# Altium PCB UM_10.PcbDoc (part 3 of 3)
Units mil, origin at the board's own origin, x right, y up, seen from the top; angles counter-clockwise.
Board outline 3937.01 x 3937.01 mil, 4 copper layers (Top, GND_02, PWR_03, Bottom), stack 35.4 mil thick; 347 components, 178 nets, 1059 pads, 909 vias.
Unrouted connection lines stored in the file: 2.
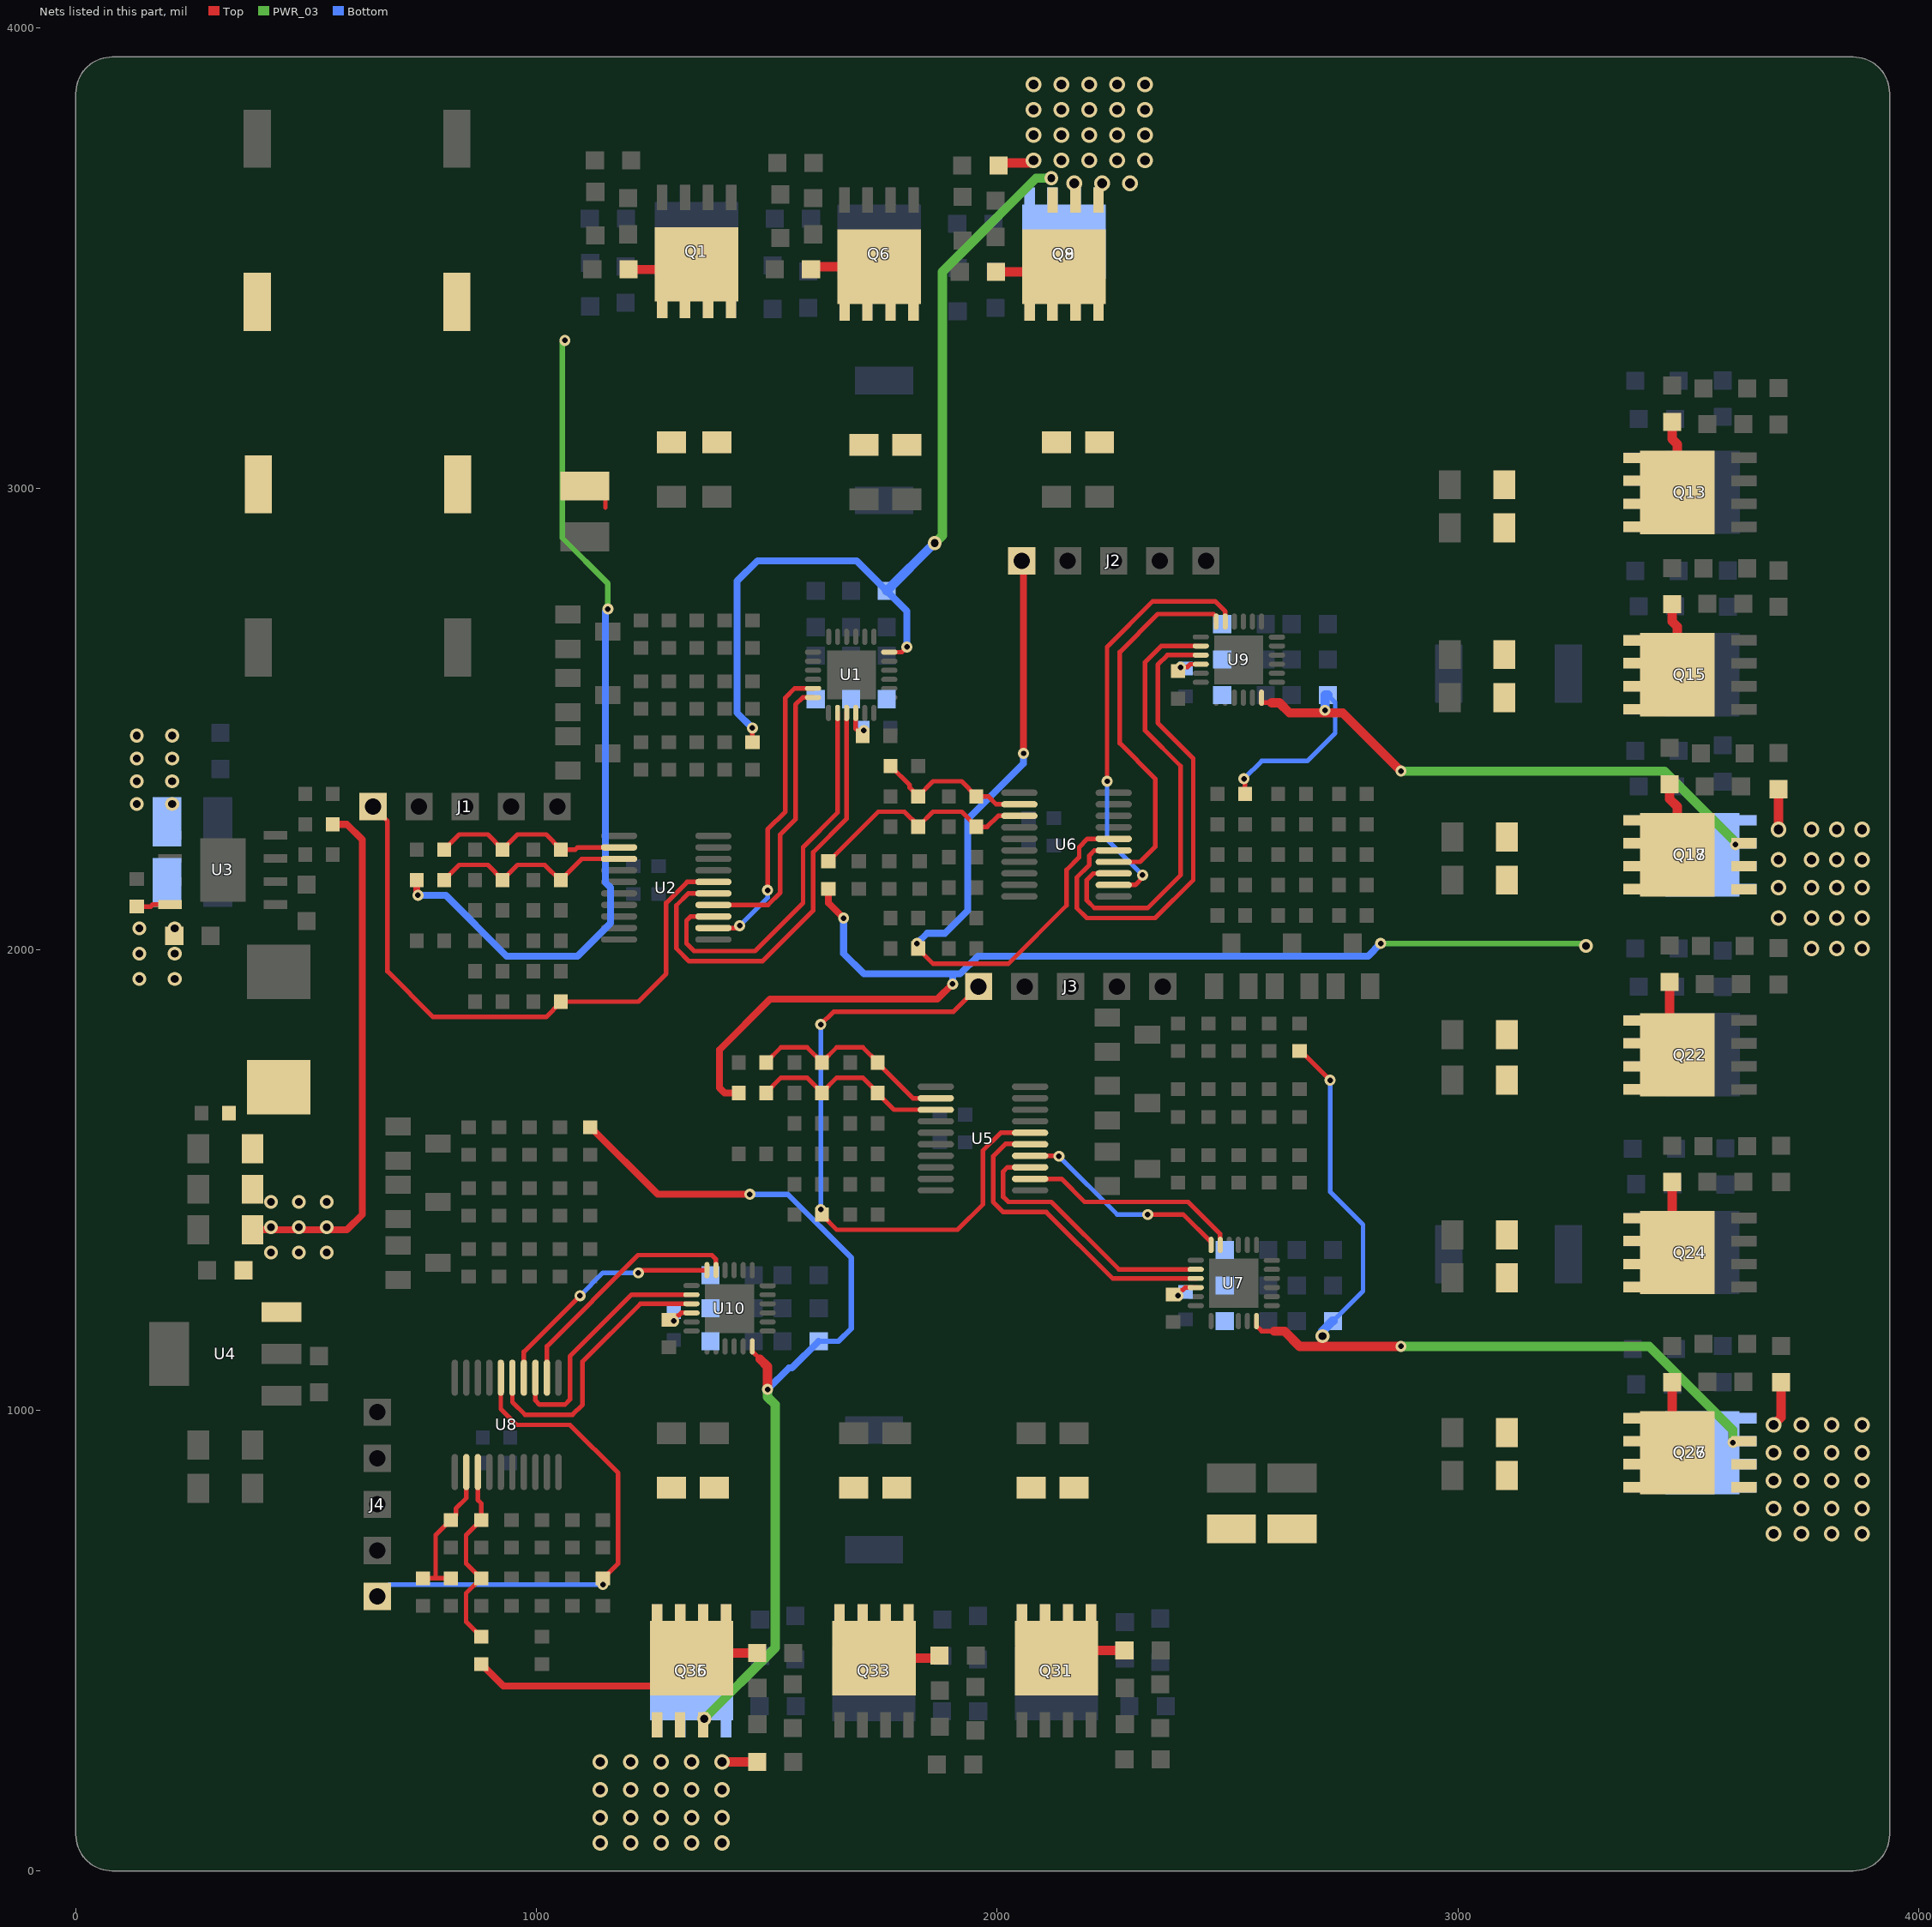
[diagram p5: the nets of this part, all layers, seen from the top]

## Via types
v1: diameter 34, hole 21, Top to Bottom, 505 vias
v2: diameter 24, hole 12, Top to Bottom, 272 vias
v3: diameter 30, hole 17, Top to Bottom, 132 vias

## Nets (pads, with @x,y where several pads share a name; then routed paths per layer and width w, separated by ;. In a path a pad name is that pad's centre, name@x,y a point inside that pad or via, vN(x,y) a via of type N, cw(c..) or ccw(c..) an arc to the next point about the centre after c; other vN are vias at no path point) (continued)
VCC_10V: C6.1 C20.1 C21.1 C22.1 C23.1 C24.1 C47.1 C48.1 C64.1 C65.1 C77.1 C90.1 C91.1 D1.2 D2.2 D3.2 D10.2 D11.2 D12.2 D19.2 D20.2 D21.2 D28.2 D29.2 D30.2 L1.2 R39.2 U1.4 U4.3 U7.4 U9.4 U10.4 | length 1381.9
  Top w10: C91.1@1287,1195.92 1287,1205.3 1308.64,1205.3 1314.5,1211.16 U10.4@1336.32,1211.16 ; U1.4@1692.84,2513.32 1692.84,2479.24 C6.1@1708.08,2464 ; C64.1@2381.5,1250.92 2381.5,1260.3 2402.25,1260.3 2408.11,1266.16 U7.4@2430.82,1266.16 ; C47.1@2392.5,2603.92 2392.5,2613.3 2413.25,2613.3 2419.11,2619.16 U9.4@2441.82,2619.16
  Top w15: C24.1@383.56,1391.5 588.5,1391.5 621.5,1424.5 621.5,2238.5 588.5,2271.5 R39.2@557.92,2271.5
  other v2: 1298,1193.5 2392.5,1248.5 1710.5,2475 2398,2612.5
  other v3: 423.5,1342 484,1342 544.5,1342 423.5,1397 484,1397 544.5,1397 423.5,1452 484,1452 544.5,1452
VCC_24V: C7.1 C10.1 C11.1 C12.1 C17.1 C18.1 C19.1 C30.1 C31.1 C32.1 C33.1 C34.1 C35.1 C36.1 C37.1 C38.1 C39.1 C40.1 C41.1 C52.1 C53.1 C54.1 C69.1 C70.1 C71.1 C78.1 C79.1 C80.1 C81.1 C82.1 C83.1 C84.1 C85.1 C95.1 C96.1 C97.1 C103.1 C104.1 C105.1 C106.1 C107.1 C108.1 C109.1 C110.1 C111.1 C112.1 Q1.5 Q1.6 Q1.7 Q1.8 Q1.9 Q6.5 Q6.6 Q6.7 Q6.8 Q6.9 Q8.5 Q8.6 Q8.7 Q8.8 Q8.9 Q13.5 Q13.6 Q13.7 Q13.8 Q13.9 Q15.5 Q15.6 Q15.7 Q15.8 Q15.9 Q17.5 Q17.6 Q17.7 Q17.8 Q17.9 Q22.5 Q22.6 Q22.7 Q22.8 Q22.9 Q24.5 Q24.6 Q24.7 Q24.8 Q24.9 Q26.5 Q26.6 Q26.7 Q26.8 Q26.9 Q31.5 Q31.6 Q31.7 Q31.8 Q31.9 Q33.5 Q33.6 Q33.7 Q33.8 Q33.9 Q35.5 Q35.6 Q35.7 Q35.8 Q35.9 R3.2 R34.2 R43.2 R79.2 R115.2 U3.8 | length 6956.4
  Top w10: R34.2@132,2093.08 162.58,2093.08 167,2097.5 U3.8@204.5,2097.5 ; C104.1@1104.66,3005.73 1149.5,3005.73 1149.5,2959
  Top w15: R3.2@740.08,2150.5 740.08,2119.92 v2(742.5,2117.5) ; R115.2@880,448.58 880.79,448.58 927.87,401.5 1303.5,401.5 1336.5,434.5 Q35.9@1336.5,461.86 ; R79.2@1438.58,1688.5 1408,1688.5 1397,1699.5 1397,1782 1507,1892 1870,1892 v2(1903,1925) ; R43.2@1633.5,2131.58 1633.5,2101 v2(1666.5,2068)
  Top w20: C10.1@1199.87,3476 1347.5,3476 Q1.9@1347.5,3487.14 ; Q35.9@1336.5,461.86 1336.5,473 C97.1@1478.63,473 ; C11.1@1595.87,3476 1595.87,3481.64 Q6.9@1743.5,3481.64 ; Q33.9@1732.5,461.86 1874.63,461.86 C96.1@1874.63,467.5 ; C12.1@1997.37,3470.5 2145,3470.5 Q8.9@2145,3481.64 ; Q31.9@2128.5,461.86 2128.5,478.5 C95.1@2276.13,478.5 ; C70.1@3459.5,1929.63 3459.5,1787.64 Q22.9@3476.14,1771 ; C54.1@3459.5,2358.63 3459.5,2326.5 3476.14,2309.86 Q17.9@3476.14,2205.5 ; C71.1@3465,1060.63 3465,918.64 Q26.9@3476.14,907.5 ; C69.1@3465,1495.13 3465,1353.14 Q24.9@3476.14,1342 ; C52.1@3465,2749.13 3465,2711.5 3476.14,2700.36 Q15.9@3476.14,2596 ; C53.1@3465,3145.13 3465,3107.5 3476.14,3096.36 Q13.9@3476.14,2992
  PWR_03 w12: v2(1061.5,3322) 1056,3316.5 1056,3311 1056,2893 1155,2794 v2(1155,2739) ; v2(2832.5,2013) 3272.5,2013 v3(3278,2007.5)
  Bottom w15: v2(742.5,2117.5) 803,2117.5 935,1985.5 1089,1985.5 1160.5,2057 1160.5,2134 1149.5,2145 1149.5,2733.5 v2(1155,2739) ; v2(1666.5,2068) 1666.5,1991 1710.5,1947 1903,1947 ; v2(1903,1925) 1903,1947 ; v2(2832.5,2013) 2805,1985.5 1958,1985.5 1919.5,1947 1903,1947
  other v3: 137.5,1936 214.5,1936 137.5,1991 214.5,1991 137.5,2046 214.5,2046 132,2315.5 209,2315.5 132,2365 209,2365 132,2414.5 209,2414.5 132,2464 209,2464
VH_1: U1.23 U2.12 | length 663.8
  Top w10: U2.12@1383.86,2046.5 1436,2046.5 v2(1441,2051.5) ; v2(1501.5,2128.5) 1501.5,2260.5 1540,2299 1540,2546.5 1559.97,2566.47 U1.23@1600.32,2566.47
  Bottom w10: v2(1441,2051.5) 1501.5,2112 v2(1501.5,2128.5)
VH_2: U6.12 U9.23 | length 930.1
  Top w10: v2(2238.5,2365) 2238.5,2656.5 2337.5,2755.5 2472.97,2755.5 2494.97,2733.5 U9.23@2494.97,2711.68 ; U6.12@2252.86,2140 2299.5,2140 2315.5,2156 v2(2315.5,2161.5)
  Bottom w10: v2(2238.5,2365) 2238.5,2238.5 v2(2315.5,2161.5)
VH_3: U5.12 U7.23 | length 485.9
  Top w10: U5.12@2071.36,1502 2139.5,1502 2189.5,1452 2414.5,1452 2483.97,1382.53 U7.23@2483.97,1358.68
VH_4: U8.12 U10.23 | length 544.7
  Top w10: U8.12@1022.5,1070.36 1022.5,1138.5 1220.5,1336.5 1380.5,1336.5 1389.47,1327.53 U10.23@1389.47,1303.68
VL_1: U1.2 U2.13 | length 858.1
  Top w10: U2.13@1383.86,2071.5 1334.5,2071.5 1325.5,2062.5 1325.5,2013 1342,1996.5 1474,1996.5 1578.5,2101 1578.5,2222 1653.47,2296.97 U1.2@1653.47,2513.32
VL_2: U6.13 U9.2 | length 977.8
  Top w10: U6.13@2252.86,2165 2208.49,2165 2194.5,2151.01 2194.5,2106.5 2211,2090 2326.5,2090 2398,2161.5 2398,2398 2321,2475 2321,2623.5 2356.03,2658.53 U9.2@2441.82,2658.53
VL_3: U5.13 U7.2 | length 600.1
  Top w10: U5.13@2071.36,1527 2022,1527 2013,1518 2013,1463 2024,1452 2117.5,1452 2263.97,1305.53 U7.2@2430.82,1305.53
VL_4: U8.13 U10.2 | length 545.5
  Top w10: U8.13@997.5,1070.36 997.5,1021 1006.5,1012 1061.5,1012 1072.5,1023 1072.5,1116.5 1206.53,1250.53 U10.2@1336.32,1250.53
VOD_1: C3.1 R3.1 R4.2 U2.3 | length 455.2
  Top w10: R3.1@799.92,2150.5 799.92,2151.29 832.13,2183.5 894.21,2183.5 R4.2@926.42,2151.29 ; R4.2@926.42,2150.5 R4.2@926.42,2151.29 ; U2.3@1179.14,2196.5 1098.13,2196.5 1052.92,2151.29 C3.1@1052.92,2150.5 1051.32,2150.5 1051.32,2149.68 1017.5,2183.5 958.63,2183.5 R4.2@926.42,2151.29
VOD_2: C25.1 R43.1 R44.2 U6.3 | length 514.5
  Top w10: R43.1@1633.5,2191.42 1634.29,2191.42 1741.87,2299 1798.5,2299 1829.57,2267.93 1829.57,2266 R44.2@1828.42,2266 1828.42,2266.79 1860.63,2299 1922.71,2299 1954.92,2266.79 C25.1@1954.92,2266 1978,2266 2002,2290 U6.3@2048.14,2290
VOD_3: C60.1 R79.1 R80.2 U5.3 | length 439.5
  Top w10: R79.1@1498.42,1688.5 1498.42,1689.29 1530.63,1721.5 1587.21,1721.5 R80.2@1619.42,1689.29 ; R80.2@1619.42,1688.5 R80.2@1619.42,1689.29 ; U5.3@1866.64,1652 1776.13,1652 1740.42,1687.71 C60.1@1740.42,1688.5 1740.42,1689.29 1708.21,1721.5 1651.63,1721.5 R80.2@1619.42,1689.29
VOD_4: C86.1 R115.1 R116.2 U8.3 | length 416.1
  Top w10: U8.3@872.5,865.64 872.5,805 880,797.5 C86.1@880,761.42 879.21,761.42 847,729.21 847,667.13 R116.2@879.21,634.92 ; R115.1@880,508.42 879.21,508.42 847,540.63 847,602.71 R116.2@879.21,634.92 ; R116.2@880,634.92 R116.2@879.21,634.92
VR_1: C1.1 R1.2 R2.2 U2.2 | length 437
  Top w10: R1.2@799.92,2216.5 799.92,2217.29 832.13,2249.5 894.21,2249.5 R2.2@926.42,2217.29 ; R2.2@926.42,2216.5 R2.2@926.42,2217.29 ; U2.2@1179.14,2221.5 1089,2221.5 1084,2216.5 C1.1@1052.92,2216.5 1052.92,2217.29 1020.71,2249.5 958.63,2249.5 R2.2@926.42,2217.29
VR_2: C26.1 R41.2 R42.2 U6.2 | length 345
  Top w10: R41.2@1768.58,2398 1809.92,2356.66 1809.92,2351.29 R42.2@1828.42,2332.79 ; R42.2@1828.42,2332 R42.2@1828.42,2332.79 ; U6.2@2048.14,2315 1997.82,2315 1980.82,2332 C26.1@1954.92,2332 1954.92,2332.79 1922.71,2365 1860.63,2365 R42.2@1828.42,2332.79
VR_3: C61.1 R77.2 R78.2 U5.2 | length 456.5
  Top w10: R77.2@1498.42,1754.5 1498.42,1755.29 1530.63,1787.5 1587.21,1787.5 R78.2@1619.42,1755.29 ; R78.2@1619.42,1754.5 R78.2@1619.42,1755.29 ; U5.2@1866.64,1677 1817.13,1677 1740.42,1753.71 C61.1@1740.42,1754.5 1740.42,1755.29 1708.21,1787.5 1651.63,1787.5 R78.2@1619.42,1755.29
VR_4: C87.1 R113.2 R114.2 U8.2 | length 319.7
  Top w10: R113.2@753.5,634.92 781,634.92 ; R114.2@814,634.92 781,634.92 ; U8.2@847.5,865.64 847.5,809 825,786.5 825,771.63 814.79,761.42 C87.1@814,761.42 813.21,761.42 781,729.21 781,634.92
W_1: C9.2 Q8.1 Q8.2 Q8.3 Q9.5 Q9.6 Q9.7 Q9.8 Q9.9 R16.1 R31.1 U1.12 | length 2066.9
  Top w10: R31.1@1468.5,2449.92 v2(1468.5,2480.5) ; U1.12@1765.68,2645.21 1793,2645.21 1793,2645.5 v2(1804,2656.5)
  Top w20: R16.1@2002.87,3701.5 2002.87,3706.91 2079,3706.91 v1(2079,3712.5)
  PWR_03 w20: v3(1864.5,2882) 1881,2898.5 1881,3470.5 2084.5,3674 v3(2117.5,3674)
  Bottom w15: v2(1468.5,2480.5) 1435.5,2513.5 1435.5,2799.5 1479.5,2843.5 1694.87,2843.5 C9.2@1760,2778.37 1804,2734.37 v2(1804,2656.5)
  Bottom w20: C9.2@1760,2778.37 1863.63,2882 v3(1864.5,2882)
  other v1: 2167,3663 2227.5,3663 2288,3663 2139.5,3712.5 2200,3712.5 2260.5,3712.5 2321,3712.5 2079,3767.5 2139.5,3767.5 2200,3767.5 2260.5,3767.5 2321,3767.5 2079,3822.5 2139.5,3822.5 2200,3822.5 2260.5,3822.5 2321,3822.5 2079,3877.5 2139.5,3877.5 2200,3877.5 2260.5,3877.5 2321,3877.5
W_2: C51.2 Q17.1 Q17.2 Q17.3 Q18.5 Q18.6 Q18.7 Q18.8 Q18.9 R56.1 R71.1 U9.12 | length 1701.8
  Top w4: v2(3602.5,2227.5) 3605.5,2230.5 Q17.3@3621.01,2230.5
  Top w10: v2(2535.5,2370.5) 2537.92,2368.08 R71.1@2537.92,2337.5 ; U9.12@2573.71,2534.12 U9.12@2573.71,2546.32 ; U9.12@2574,2535.5 2574,2546.04 U9.12@2573.71,2546.32 ; 2596,2535.5 2573.71,2535.5 U9.12@2573.71,2546.32
  Top w20: 2596,2535.5 2612.5,2535.5 2634.5,2513.5 2750,2513.5 v2(2876.5,2387) ; v1(3696,2260.5) R56.1@3696,2347.63
  PWR_03 w20: v2(2876.5,2387) 3448.5,2387 3602.5,2233 v2(3602.5,2227.5)
  Bottom w10: v2(2535.5,2370.5) 2574,2409 2673,2409 2733.5,2469.5 2733.5,2536.37 C51.2@2717.87,2552
  Bottom w20: v2(2711.5,2519) 2711.5,2552 C51.2@2717.87,2552
  other v1: 3767.5,2002 3822.5,2002 3877.5,2002 3696,2068 3767.5,2068 3822.5,2068 3877.5,2068 3696,2134 3767.5,2134 3822.5,2134 3877.5,2134 3696,2194.5 3767.5,2194.5 3822.5,2194.5 3877.5,2194.5 3767.5,2260.5 3822.5,2260.5 3877.5,2260.5
W_3: C68.2 Q26.1 Q26.2 Q26.3 Q27.5 Q27.6 Q27.7 Q27.8 Q27.9 R92.1 R107.1 U7.12 | length 2027
  Top w4: v2(3597,929.5) 3600,932.5 Q26.3@3621.01,932.5
  Top w10: U7.12@2562.71,1193.32 2563,1193.04 2563,1182.5 2574,1171.5 2601.5,1171.5 ; R107.1@2656.5,1779.58 2658.92,1779.58 v2(2722.5,1716)
  Top w20: 2601.5,1171.5 2623.5,1171.5 2656.5,1138.5 2706,1138.5 ; v3(2706,1160.5) 2706,1138.5 ; v2(2876.5,1138.5) 2706,1138.5 ; v1(3685,968) 3701.5,984.5 R92.1@3701.5,1060.63
  PWR_03 w20: v2(2876.5,1138.5) 3415.5,1138.5 3597,957 v2(3597,929.5)
  Bottom w10: v3(2706,1160.5) v3@2706,1171.5 ; v2(2722.5,1716) 2722.5,1474 2794,1402.5 2794,1258.63 C68.2@2728.87,1193.5
  Bottom w20: v3@2706,1171.5 2728,1193.5 C68.2@2728.87,1193.5
  other v1: 3685,731.5 3745.5,731.5 3811.5,731.5 3877.5,731.5 3685,786.5 3745.5,786.5 3811.5,786.5 3877.5,786.5 3685,847 3745.5,847 3811.5,847 3877.5,847 3685,907.5 3745.5,907.5 3811.5,907.5 3877.5,907.5 3745.5,968 3811.5,968 3877.5,968
W_4: C94.2 Q35.1 Q35.2 Q35.3 Q36.5 Q36.6 Q36.7 Q36.8 Q36.9 R128.1 R143.1 U10.12 | length 2045.1
  Top w10: R143.1@1116.5,1611.5 R143.1@1116.5,1613.92 ; U10.12@1468.21,1138.32 1468.5,1138.04 1468.5,1127.5 1485,1111
  Top w15: R143.1@1116.5,1613.92 1117.29,1613.92 1262.71,1468.5 v2(1463,1468.5)
  Top w20: v1(1402.5,236.5) R128.1@1478.63,236.5 ; 1485,1111 1501.5,1094.5 v2(1501.5,1045)
  PWR_03 w20: v3(1364,330) 1518,484 1518,1012 1501.5,1028.5 v2(1501.5,1045)
  Bottom w12: v2(1463,1468.5) 1545.5,1468.5 1683,1331 1683,1177 1655.5,1149.5 C94.2@1612.37,1149.5
  Bottom w15: v2(1501.5,1045) 1548.15,1091.65 1554.52,1091.65 C94.2@1612.37,1149.5
  other v1: 1138.5,60.5 1204.5,60.5 1270.5,60.5 1336.5,60.5 1402.5,60.5 1138.5,115.5 1204.5,115.5 1270.5,115.5 1336.5,115.5 1402.5,115.5 1138.5,176 1204.5,176 1270.5,176 1336.5,176 1402.5,176 1138.5,236.5 1204.5,236.5 1270.5,236.5 1336.5,236.5
WH_1: U1.24 U2.14 | length 622.7
  Top w10: U2.14@1383.86,2096.5 1502.5,2096.5 1529,2123 1529,2249.5 1562,2282.5 1562,2531.18 1577.61,2546.79 U1.24@1600.32,2546.79
WH_2: U6.14 U9.24 | length 814.6
  Top w10: U6.14@2252.86,2190 2310,2190 2343,2223 2343,2370.5 2266,2447.5 2266,2645.5 2348.5,2728 2469.5,2728 2475.29,2722.21 U9.24@2475.29,2711.68
WH_3: U5.14 U7.24 | length 476.9
  Top w10: U5.14@2071.36,1552 2071.36,1551.73 2134,1551.73 v2(2134,1551) ; v2(2326.5,1424.5) 2404.07,1424.5 2464.29,1364.29 U7.24@2464.29,1358.68
  Bottom w10: v2(2134,1551) 2260.5,1424.5 v2(2326.5,1424.5)
WH_4: U8.14 U10.24 | length 526.8
  Top w10: U8.14@972.5,1070.36 972.5,1126.5 v2(1094.5,1248.5) ; v2(1221,1298) 1226.67,1303.67 U10.24@1369.79,1303.68
  Bottom w10: v2(1094.5,1248.5) 1144,1298 v2(1221,1298)
WL_1: U1.3 U2.15 | length 999
  Top w10: U2.15@1383.86,2123 U2.15@1383.86,2121.5 1329.5,2121.5 1303.5,2095.5 1303.5,2002 1331,1974.5 1490.5,1974.5 1600.5,2084.5 1600.5,2211 1673.16,2283.66 U1.3@1673.16,2513.32
WL_2: U6.15 U9.3 | length 1080.4
  Top w10: U6.15@2252.86,2215 2211,2215 2200,2204 2200,2183.5 2172.5,2156 2172.5,2090 2194.5,2068 2343,2068 2425.5,2150.5 2425.5,2414.5 2348.5,2491.5 2348.5,2618 2369.34,2638.84 U9.3@2441.82,2638.84
WL_3: U5.15 U7.3 | length 700.2
  Top w10: U5.15@2071.36,1577 2071.36,1577.97 2017.97,1577.97 1991,1551 1991,1452 2013,1430 2106.5,1430 2250.66,1285.84 U7.3@2430.82,1285.84
WL_4: U8.15 U10.3 | length 607.6
  Top w10: U8.15@947.5,1070.36 947.5,1017.5 975,990 1078,990 1100,1012 1100,1105.5 1225.34,1230.84 U10.3@1336.32,1230.84
ZF_1: J1.5 R24.1 U2.16 | length 1331
  Top w10: J1.5@645,2310 676.5,2278.5 676.5,1952.5 775.5,1853.5 1020.71,1853.5 1052.92,1885.71 R24.1@1052.92,1886.5 1221,1886.5 1281.5,1947 1281.5,2101 1327,2146.5 U2.16@1383.86,2146.5
ZF_2: J2.5 R64.1 U6.16 | length 1571.2
  Top w10: v2(1826,2013) 1828.42,2010.58 R64.1@1828.42,2002 1828.42,2001.21 1860.63,1969 2024,1969 2150.5,2095.5 2150.5,2172.5 2178,2200 2178,2222 2196,2240 U6.16@2252.86,2240
  Top w15: J2.5@2053,2843.5 2057,2839.5 v2(2057,2425.5)
  Bottom w15: v2(1826,2013) 1848,2035 1886.5,2035 1936,2084.5 1936,2282.5 2057,2403.5 v2(2057,2425.5)
ZF_3: J3.5 R100.1 U5.16 | length 1435
  Top w4: v2(1617,1435.5) 1619.42,1433.08 R100.1@1619.42,1424.5
  Top w10: v2(1617,1435.5) 1617,1441 1619.42,1438.58 R100.1@1619.42,1424.5 1619.42,1423.71 1651.63,1391.5 1914,1391.5 1969,1446.5 1969,1563.5 2007.5,1602 U5.16@2071.36,1602 ; v2(1617,1837) 1644.5,1864.5 1904.5,1864.5 J3.5@1959.5,1919.5
  Bottom w10: v2(1617,1435.5) v2(1617,1837)
ZF_4: J4.5 R136.1 U8.16 | length 1136.3
  Top w10: U8.16@922.5,1070.36 922.5,1002.5 957,968 1072.5,968 1177,863.5 1177,667.13 1144.79,634.92 R136.1@1144,634.92 v2(1144,621.5)
  Bottom w10: J4.5@654.5,595.5 680.5,621.5 v2(1144,621.5)
pads on no net: Q2.1 Q2.2 Q2.3 Q3.1 Q3.2 Q3.3 Q4.1 Q4.2 Q4.3 Q10.1 Q10.2 Q10.3 Q11.1 Q11.2 Q11.3 Q12.1 Q12.2 Q12.3 Q19.1 Q19.2 Q19.3 Q20.1 Q20.2 Q20.3 Q21.1 Q21.2 Q21.3 Q28.1 Q28.2 Q28.3 Q29.1 Q29.2 Q29.3 Q30.1 Q30.2 Q30.3 U1.5 U1.7 U1.8 U1.21 U3.5 U3.6 U7.5 U7.7 U7.8 U7.21 U9.5 U9.7 U9.8 U9.21 U10.5 U10.7 U10.8 U10.21

## Polygon pours and split planes (outlines as drawn)
VCC_24V on Top "Top-VCC_24V" (solid, remove dead copper, pour order 154): 3322,3107.5 3322,2865.5 3580.5,2865.5 3580.5,3107.5
GND on Top "Top-GND" (solid, remove dead copper, pour order 152): -5.5,3520 1094.5,3520 1094.5,3943.5 -5.5,3943.5
V_4 on Top "Top-V_4" (solid, remove dead copper, pour order 148): 1782,341 1595,341 1595,198 1523.5,198 1523.5,-5.5 1826,-5.5 1826,275 1782,275
VCC_24V on Top "Top-VCC_24V 1" (solid, remove dead copper, pour order 142): 3346.46,590.55 3346.46,787.4 2322.83,787.4 2322.83,866.14 1221,866.14 1221,590.55
U_1 on Top "Top-U_1" (solid, remove dead copper, pour order 140): 1303.5,3602.5 1479.5,3602.5 1479.5,3745.5 1556.5,3745.5 1556.5,3938 1254,3938 1254,3674 1303.5,3674
W_3 on Top "Top-W_3" (solid, remove dead copper, pour order 136): 3597,709.5 3938,709.5 3938,995.5 3663,995.5 3663,957 3597,957
W_1 on Top "Top-W_1" (solid, remove dead copper, pour order 134): 2095.5,3597 2359.5,3597 2359.5,3940.75 2059.75,3940.75 2051.5,3932.5 2051.5,3663 2095.5,3663
VCC_5.0V on Top "Top-VCC_5.0V" (solid, remove dead copper, pour order 124): 324.5,869 110,869 110,561 324.5,561
W_2 on Top "Top-W_2" (solid, remove dead copper, pour order 120): 3597,2255 3597,2040.5 3729,2040.5 3729,1958 3938,1958 3938,2293.5 3663,2293.5 3663,2255
AGND on Top "Top-AGND" (solid, remove dead copper, pour order 114): 297,1677.5 0,1677.5 0,1270.5 324.5,1270.5 324.5,1595 297,1595
VCC_24V on Top "Top-VCC_24V 2" (solid, remove dead copper, pour order 112): 3426.5,2068 3322,2068 3322,1639 3580.5,1639 3580.5,1886.5 3426.5,1886.5
W_4 on Top "Top-W_4" (solid, remove dead copper, pour order 110): 1386,346.5 1111,346.5 1111,0 1430,0 1430,275 1386,275
GND on Top "Top-GND 1" (solid, remove dead copper, pour order 108): 1221,885.5 2337.5,885.5 2337.5,803 2964.5,803 2970,808.5 2970,1023 1221,1023
VCC_24V on Top "Top-VCC_24V 3" (solid, remove dead copper, pour order 104): 1430,3437.5 1430,3316.5 1853.5,3316.5 1853.5,3586 1633.5,3586 1633.5,3437.5
VCC_10V on Top "Top-VCC_10V" (solid, remove dead copper, pour order 100): 401.5,1320 561,1320 561,1474 401.5,1474
GND on Top "Top-GND 2" (solid, remove dead copper, pour order 98): 1193.5,2920.5 2915,2920.5 2915,803 3052.5,803 3052.5,3047 1193.5,3047
U_4 on Top "Top-U_4" (solid, remove dead copper, pour order 94): 1985.5,346.5 1985.5,192.5 1919.5,192.5 1919.5,5.5 2222,5.5 2222,275 2178,275 2178,346.5
VCC_24V on Top "Top-VCC_24V 4" (solid, remove dead copper, pour order 90): 3410,2904 3344,2904 3344,2695 3410,2695
VCC_24V on Top "Top-VCC_24V 5" (solid, remove dead copper, pour order 88): 2018.5,610.5 2018.5,357.5 2244,357.5 2244,610.5
VCC_24V on Top "Top-VCC_24V 6" (solid, remove dead copper, pour order 86): 3333,2706 3333,2486 3580.5,2486 3580.5,2706
VCC_24V on Top "Top-VCC_24V 7" (solid, remove dead copper, pour order 82): 1837,3437.5 1837,3316.5 2244,3316.5 2244,3586 2029.5,3586 2029.5,3437.5
VCC_24V on Top "Top-VCC_24V 8" (solid, remove dead copper, pour order 80): 2795.28,3346.46 2795.28,3063.5 3070.87,3063.5 3070.87,708.66 3346.46,708.66 3346.46,3346.46
U_2 on Top "Top-U_2" (solid, remove dead copper, pour order 74): 3597,3041.5 3597,2865.5 3729,2865.5 3729,2783 3938,2783 3938,3085.5 3663,3085.5 3663,3041.5
VCC_24V on Top "Top-VCC_24V 9" (solid, remove dead copper, pour order 72): 27.5,2959 27.5,2282.5 236.5,2282.5 236.5,2959
VCC_24V on Top "Top-VCC_24V 10" (solid, remove dead copper, pour order 64): 2035,561 2035,616 1600.5,616 1600.5,357.5 1842.5,357.5 1842.5,503.25 1944.25,503.25 2002,561
VCC_10V on Top "Top-VCC_10V 1" (solid, remove dead copper, pour order 60): 506,1754.5 374,1754.5 374,1677.5 313.5,1677.5 313.5,1611.5 341,1611.5 341,1276 451,1276 451,1611.5 506,1611.5
V_1 on Top "Top-V_1" (solid, remove dead copper, pour order 58): 1892,3597 1892,3734.5 1958,3734.5 1958,3938 1650,3938 1650,3663 1688.5,3663 1688.5,3597
$$$11219 on Top "Top-$$$11219" (solid, remove dead copper, pour order 56): 407,2123 533.5,2123 533.5,2167 407,2167
VCC_24V on Top "Top-VCC_24V 11" (solid, remove dead copper, pour order 54): 1501.5,555.5 1501.5,500.5 1628,500.5 1628,555.5
VCC_24V on Top "Top-VCC_24V 12" (solid, remove dead copper, pour order 52): 1221,616 1221,363 1452,363 1452,445.5 1523.5,445.5 1523.5,506 1562,506 1611.5,555.5 1611.5,616
VCC_24V on Top "Top-VCC_24V 13" (solid, remove dead copper, pour order 48): 0,3503.94 0,2948 1181.1,2948 1181.1,3063.5 2874.02,3063.5 2874.02,3346.46 1220.47,3346.46 1220.47,3426.5 1039.5,3426.5 1039.5,3503.94
GND on Top "Top-GND 3" (solid, remove dead copper, pour order 42): 1606,2931.5 253,2931.5 253,2370.5 1028.5,2370.5 1028.5,2761 1496,2761 1496,2799.5 1606,2799.5
V_2 on Top "Top-V_2" (solid, remove dead copper, pour order 40): 3591.5,2651 3591.5,2458.5 3729,2458.5 3729,2403.5 3932.5,2403.5 3932.5,2689.5 3657.5,2689.5 3657.5,2651
AGND on Top "Top-AGND 1" (solid, remove dead copper, pour order 36): 341,781 555.5,781 555.5,1078 341,1078
$$$11220 on Top "Top-$$$11220" (solid, remove dead copper, pour order 34): 407,2106.5 407,2073.5 368.5,2073.5 368.5,1897.5 533.5,1897.5 533.5,2106.5
VCC_5.0V on Top "Top-VCC_5.0V 1" (solid, remove dead copper, pour order 28): 363,1155 324.5,1155 324.5,1193.5 154,1193.5 154,1050.5 231,1050.5 231,781 324.5,781 324.5,1094.5 363,1094.5
VCC_24V on Top "Top-VCC_24V 14" (solid, remove dead copper, pour order 26): 99,2106.5 99,1908.5 236.5,1908.5 236.5,2106.5
AGND on Top "Top-AGND 2" (solid, remove dead copper, pour order 22): 253,2007.5 352,2007.5 352,2090 390.5,2090 390.5,2244 253,2244
VCC_5.0V on Top "Top-VCC_5.0V 2" (solid, remove dead copper, pour order 20): 341,1155 341,1094.5 555.5,1094.5 555.5,1155
VCC_24V on Top "Top-VCC_24V 15" (solid, remove dead copper, pour order 18): 3377,1650 3300,1650 3300,1221 3580.5,1221 3580.5,1463 3429.25,1463 3429.25,1564.75 3377,1617
VCC_24V on Top "Top-VCC_24V 16" (solid, remove dead copper, pour order 16): 1210,3426.5 1210,3327.5 1452,3327.5 1452,3591.5 1237.5,3591.5 1237.5,3426.5
VCC_24V on Top "Top-VCC_24V 17" (solid, remove dead copper, pour order 14): 3388,1243 3311,1243 3311,803 3580.5,803 3580.5,1034 3434.75,1034 3434.75,1135.75 3388,1182.5
U_3 on Top "Top-U_3" (solid, remove dead copper, pour order 12): 3597,1820.5 3597,1606 3740,1606 3740,1529 3938,1529 3938,1864.5 3657.5,1864.5 3657.5,1820.5
V_3 on Top "Top-V_3" (solid, remove dead copper, pour order 10): 3597,1391.5 3597,1177 3740,1177 3740,1100 3938,1100 3938,1435.5 3663,1435.5 3663,1391.5
VCC_24V on Top "Top-VCC_24V 18" (solid, remove dead copper, pour order 4): 3421,2502.5 3316.5,2502.5 3316.5,2057 3580.5,2057 3580.5,2326.5 3421,2326.5
VCC_10V on Top "Top-VCC_10V 2" (solid, remove dead copper, pour order 0): 341,1309 341,1188 489.5,1188 489.5,1309
W_3 on Bottom "Bottom-W_3" (solid, remove dead copper, pour order 146): 3448.5,995.5 3448.5,709.5 3927,709.5 3927,995.5
GND on Bottom "Bottom-GND" (solid, remove dead copper, pour order 144): 2898.5,979 3184.5,979 3184.5,3179 2898.5,3179
U_3 on Bottom "Bottom-U_3" (solid, remove dead copper, pour order 138): 3454,1864.5 3454,1650 3619,1650 3619,1529 3938,1529 3938,1864.5
VCC_10V on Bottom "Bottom-VCC_10V" (solid, remove dead copper, pour order 132): 1782,2568.5 1518,2568.5 1518,2095.5 1644.5,2095.5 1644.5,2348.5 1738,2348.5 1738,2508 1782,2508
W_2 on Bottom "Bottom-W_2" (solid, remove dead copper, pour order 130): 3454,2293.5 3454,2040.5 3608,2040.5 3608,1958 3927,1958 3927,2293.5
IOUT_4 on Bottom "Bottom-IOUT_4" (solid, remove dead copper, pour order 128): 1248.5,522.5 1386,522.5 1386,588.5 1595,588.5 1595,522.5 1782,522.5 1782,588.5 1991,588.5 1991,522.5 2167,522.5 2167,726 1248.5,726
IOUT_1 on Bottom "Bottom-IOUT_1" (solid, remove dead copper, pour order 126): 1303.5,3426.5 1303.5,3206.5 2238.5,3206.5 2238.5,3426.5 2095.5,3426.5 2095.5,3355 1881,3355 1881,3426.5 1694,3426.5 1694,3355 1479.5,3355 1479.5,3426.5
VCC_10V on Bottom "Bottom-VCC_10V 1" (solid, remove dead copper, pour order 122): 2524.5,1369.5 2222,1369.5 2150.5,1441 1848,1441 1848,1721.5 1694,1721.5 1694,1353 1820.5,1226.5 2442,1226.5 2442,1166 2524.5,1166
V_1 on Bottom "Bottom-V_1" (solid, remove dead copper, pour order 118): 1650,3454 1875.5,3454 1875.5,3624.5 1958,3624.5 1958,3938 1650,3938
IOUT_2 on Bottom "Bottom-IOUT_2" (solid, remove dead copper, pour order 116): 3421,2106.5 3421,2255 3349.5,2255 3349.5,2464 3415.5,2464 3415.5,2645.5 3349.5,2645.5 3349.5,2854.5 3415.5,2854.5 3415.5,3041.5 3212,3041.5 3212,2106.5
GND on Bottom "Bottom-GND 1" (solid, remove dead copper, pour order 106): 1237.5,1028.5 1237.5,764.5 3184.5,764.5 3184.5,1028.5
VCC_10V on Bottom "Bottom-VCC_10V 2" (solid, remove dead copper, pour order 102): 407,1314.5 588.5,1314.5 588.5,1672 1292.5,1672 1292.5,1859 407,1859
VCC_10V on Bottom "Bottom-VCC_10V 3" (solid, remove dead copper, pour order 96): 1243,1677.5 1523.5,1677.5 1523.5,1771 1699.5,1771 1699.5,1661 1848,1661 1848,1996.5 1644.5,1996.5 1644.5,2183.5 1518,2183.5 1518,1996.5 1243,1996.5
VCC_24V on Bottom "Bottom-VCC_24V" (solid, remove dead copper, pour order 92): 99,2502.5 99,1908.5 236.5,1908.5 236.5,2502.5
GND on Bottom "Bottom-GND 2" (solid, remove dead copper, pour order 84): 3113,3168 1177,3168 1177,2904 3113,2904
GND on Bottom "Bottom-GND 3" (solid, remove dead copper, pour order 78): 1413.5,3168 1039.5,3168 1039.5,3932.5 0,3932.5 0,2519 253,2519 253,2442 407,2442 407,2370.5 1012,2370.5 1012,2766.5 1413.5,2766.5
VCC_10V on Bottom "Bottom-VCC_10V 4" (solid, remove dead copper, pour order 76): 1243,1188 1336.5,1188 1336.5,1122 1397,1122 1397,1771 1243,1771
V_2 on Bottom "Bottom-V_2" (solid, remove dead copper, pour order 70): 3448.5,2689.5 3448.5,2475 3613.5,2475 3613.5,2403.5 3932.5,2403.5 3932.5,2689.5
V_4 on Bottom "Bottom-V_4" (solid, remove dead copper, pour order 68): 1826,489.5 1628,489.5 1628,324.5 1523.5,324.5 1523.5,-5.5 1826,-5.5
AGND on Bottom "Bottom-AGND" (solid, remove dead copper, pour order 66): 253,2425.5 253,2007.5 390.5,2007.5 390.5,2425.5
IOUT_3 on Bottom "Bottom-IOUT_3" (solid, remove dead copper, pour order 50): 3415.5,814 3415.5,957 3344,957 3344,1171.5 3415.5,1171.5 3415.5,1391.5 3344,1391.5 3344,1600.5 3415.5,1600.5 3415.5,1820.5 3212,1820.5 3212,814
U_4 on Bottom "Bottom-U_4" (solid, remove dead copper, pour order 46): 2029.5,489.5 2029.5,308 1919.5,308 1919.5,-11 2222,-11 2222,489.5
V_3 on Bottom "Bottom-V_3" (solid, remove dead copper, pour order 44): 3448.5,1435.5 3448.5,1215.5 3613.5,1215.5 3613.5,1100 3932.5,1100 3932.5,1435.5
U_1 on Bottom "Bottom-U_1" (solid, remove dead copper, pour order 38): 1254,3459.5 1479.5,3459.5 1479.5,3624.5 1556.5,3624.5 1556.5,3932.5 1254,3932.5
U_2 on Bottom "Bottom-U_2" (solid, remove dead copper, pour order 32): 3448.5,3085.5 3448.5,2854.5 3619,2854.5 3619,2783 3932.5,2783 3932.5,3085.5
W_1 on Bottom "Bottom-W_1" (solid, remove dead copper, pour order 30): 2051.5,3454 2359.5,3454 2359.5,3932.5 2051.5,3932.5
VCC_10V on Bottom "Bottom-VCC_10V 5" (solid, remove dead copper, pour order 24): 1633.5,2447.5 1633.5,2345.75 1966.25,2345.75 2024,2403.5 2024,2585 2458.5,2585 2458.5,2519 2513.5,2519 2513.5,2744.5 1892,2744.5 1892,2447.5
W_4 on Bottom "Bottom-W_4" (solid, remove dead copper, pour order 8): 1424.5,489.5 1111,489.5 1111,-5.5 1430,-5.5 1430,484
AGND on Bottom "Bottom-AGND 1" (solid, remove dead copper, pour order 6): 253,2024 253,1892 -5.5,1892 -5.5,1270.5 390.5,1270.5 390.5,2024
GND on Bottom "Bottom-GND 4" (solid, remove dead copper, pour order 2): 1177,2920.5 2310,2920.5 2310,3058 1177,3058
U_3 on Solder Mask Top (solid): 3759.84,1850.39 3759.84,1614.17 3897.64,1614.17 3897.64,1850.39
V_3 on Solder Mask Top (solid): 3759.84,1417.32 3759.84,1200.79 3897.64,1200.79 3897.64,1417.32
VCC_24V on Solder Mask Top (solid): 33,3322 33,3085.5 1149.5,3085.5 1149.5,3151.5 3146,3151.5 3146,698.5 1248.5,698.5 1248.5,621.5 3316.5,621.5 3316.5,3322
V_1 on Solder Mask Top (solid): 1692.91,3877.95 1692.91,3759.84 1929.13,3759.84 1929.13,3877.95
W_2 on Solder Mask Top (solid): 3759.84,2283.46 3759.84,2047.24 3897.64,2047.24 3897.64,2283.46
V_4 on Solder Mask Top (solid): 1811.02,177.17 1594.49,177.17 1594.49,39.37 1811.02,39.37
W_1 on Solder Mask Top (solid): 2066.93,3877.95 2066.93,3759.84 2303.15,3759.84 2303.15,3877.95
W_4 on Solder Mask Top (solid): 1417.32,177.17 1181.1,177.17 1181.1,39.37 1417.32,39.37
W_3 on Solder Mask Top (solid): 3759.84,984.25 3759.84,748.03 3897.64,748.03 3897.64,984.25
U_4 on Solder Mask Top (solid): 2204.72,177.17 1968.5,177.17 1968.5,39.37 2204.72,39.37
V_2 on Solder Mask Top (solid): 3759.84,2677.17 3759.84,2440.94 3897.64,2440.94 3897.64,2677.17
U_2 on Solder Mask Top (solid): 3759.84,3070.87 3759.84,2854.33 3877.95,2854.33 3877.95,3070.87
U_1 on Solder Mask Top (solid): 1279.53,3877.95 1279.53,3759.84 1535.43,3759.84 1535.43,3877.95
W_3 on Solder Mask Bottom (solid): 3897.64,984.25 3759.84,984.25 3759.84,748.03 3897.64,748.03
W_4 on Solder Mask Bottom (solid): 1181.1,177.17 1181.1,39.37 1417.32,39.37 1417.32,177.17
W_2 on Solder Mask Bottom (solid): 3759.84,2283.46 3759.84,2047.24 3897.64,2047.24 3897.64,2283.46
U_4 on Solder Mask Bottom (solid): 1968.5,177.17 1968.5,39.37 2204.72,39.37 2204.72,177.17
U_3 on Solder Mask Bottom (solid): 3759.84,1850.39 3759.84,1614.17 3897.64,1614.17 3897.64,1850.39
V_4 on Solder Mask Bottom (solid): 1594.49,177.17 1594.49,39.37 1811.02,39.37 1811.02,177.17
U_1 on Solder Mask Bottom (solid): 1279.53,3877.95 1279.53,3759.84 1535.43,3759.84 1535.43,3877.95
IOUT_4 on Solder Mask Bottom (solid): 1820.5,704 1820.5,610.5 2150.5,610.5 2150.5,704
U_2 on Solder Mask Bottom (solid): 3759.84,3070.87 3759.84,2854.33 3877.95,2854.33 3877.95,3070.87
V_1 on Solder Mask Bottom (solid): 1692.91,3877.95 1692.91,3759.84 1929.13,3759.84 1929.13,3877.95
IOUT_4 on Solder Mask Bottom (solid): 1265,704 1265,610.5 1633.5,610.5 1633.5,704
IOUT_3 on Solder Mask Bottom (solid): 3234,1804 3234,1424.5 3322,1424.5 3322,1804
W_1 on Solder Mask Bottom (solid): 2066.93,3877.95 2066.93,3759.84 2303.15,3759.84 2303.15,3877.95
GND on Solder Mask Bottom (solid): 59.06,3385.83 59.06,2933.07 2952.76,2933.07 2952.76,1003.94 1279.53,1003.94 1279.53,807.09 3149.61,807.09 3149.61,3149.61 492.13,3149.61 492.13,3385.83
IOUT_1 on Solder Mask Bottom (solid): 1325.5,3322 1325.5,3234 1655.5,3234 1655.5,3322
V_2 on Solder Mask Bottom (solid): 3759.84,2677.17 3759.84,2440.94 3897.64,2440.94 3897.64,2677.17
IOUT_2 on Solder Mask Bottom (solid): 3234,3019.5 3234,2689.5 3322,2689.5 3322,3019.5
IOUT_3 on Solder Mask Bottom (solid): 3322,830.5 3322,1237.5 3234,1237.5 3234,830.5
V_3 on Solder Mask Bottom (solid): 3897.64,1417.32 3759.84,1417.32 3759.84,1200.79 3897.64,1200.79
IOUT_1 on Solder Mask Bottom (solid): 2211,3333 1848,3333 1848,3234 2211,3234
IOUT_2 on Solder Mask Bottom (solid): 3234,2134 3322,2134 3322,2513.5 3234,2513.5
AGND on GND_02 "GND_02-AGND" (solid, remove dead copper, pour order 62): -16.5,3965.5 -16.5,-33 3971,-33 3971,3965.5
VCC_5.0V on PWR_03 "PWR_03-VCC_5.0V" (solid, remove dead copper, pour order 150): 93.5,445.5 1243,445.5 1243,1012 1402.5,1012 1402.5,1122 2777.5,1122 2777.5,1837 2821.5,1837 2821.5,2425.5 2585,2425.5 2585,2535.5 2634.5,2535.5 2634.5,2937 1930.5,2937 1930.5,2563 1754.5,2563 1754.5,2684 1006.5,2684 1006.5,2365 577.5,2365 577.5,1248.5 93.5,1248.5

## Keep-outs
Keep-Out Layer:
  lines w4: 744.09,393.7 830.71,393.7 ; 744.09,3543.31 830.71,3543.31 ; 3093.93,3543.31 3205.28,3543.31 ; 3106.3,393.7 3192.91,393.7 ; 0,78.74 ccw(c78.74,78.74) 78.74,0 3858.27,0 ccw(c3858.27,78.74) 3937.01,78.74 3937.01,3858.27 ccw(c3858.27,3858.27) 3858.27,3937.01 78.74,3937.01 ccw(c78.74,3858.27) 0,3858.27 0,78.74

## Other copper
GND_02:
  pour cut-out: 119.5,2055.5 119.5,1929 158,1929 158,2055.5 119.5,2055.5
  pour cut-out: 108.5,2473.5 108.5,2308.5 152.5,2308.5 152.5,2473.5 108.5,2473.5
  pour cut-out: 2924.5,2314 2924.5,2055.5 3040,2055.5 3040,2314 2924.5,2314
  pour cut-out: 1522,2798 1522,2754 1571.5,2754 1571.5,2798 1522,2798
  pour cut-out: 2385.5,1010.5 2385.5,878.5 2891.5,878.5 2891.5,1010.5 2385.5,1010.5
  pour cut-out: 191,2473.5 191,2308.5 229.5,2308.5 229.5,2473.5 191,2473.5
  pour cut-out: 2930,2990.5 2930,2847.5 3045.5,2847.5 3045.5,2990.5 2930,2990.5
  pour cut-out: 3914.5,3078.5 3733,3078.5 3733,1126 3914.5,1126 3914.5,3078.5
  pour cut-out: 405.5,1467 405.5,1335 444,1335 444,1467 405.5,1467
  pour cut-out: 2000.5,3040 2000.5,2935.5 2792.5,2935.5 2792.5,3040 2000.5,3040
  pour cut-out: 2220.5,26 2220.5,125 1923.5,125 1923.5,26 2220.5,26
  pour cut-out: 1258,1010.5 1258,895 1439.5,895 1439.5,1010.5 1258,1010.5
  pour cut-out: 2033.5,1010.5 2033.5,895 2220.5,895 2220.5,1010.5 2033.5,1010.5
  pour cut-out: 1252.5,3914.5 1252.5,3623 1571.5,3623 1571.5,3914.5 1252.5,3914.5
  pour cut-out: 3023.5,3018 3023.5,3029 2957.5,3029 2957.5,3018 3023.5,3018
  pour cut-out: 2924.5,1434 2924.5,1203 3045.5,1203 3045.5,1434 2924.5,1434
  pour cut-out: 466,1467 466,1340.5 504.5,1340.5 504.5,1467 466,1467
  pour cut-out: 1747.5,284.5 1747.5,290 1648.5,290 1648.5,284.5 1747.5,284.5
  pour cut-out: 2930,1846.5 2930,1588 3040,1588 3040,1846.5 2930,1846.5
  pour cut-out: 1560.5,3914.5 1560.5,3623 2363.5,3623 2363.5,3914.5 1560.5,3914.5
  pour cut-out: 1577,1010.5 1577,895 1824.5,895 1824.5,1010.5 1577,1010.5
  pour cut-out: 526.5,1461.5 526.5,1335 565,1335 565,1461.5 526.5,1461.5
  pour cut-out: 1593.5,180 1593.5,185.5 1566,185.5 1566,180 1593.5,180
  pour cut-out: 1610,3034.5 1610,2930 1846.5,2930 1846.5,3034.5 1610,3034.5
  pour cut-out: 2858.5,2440.5 2858.5,2341.5 2897,2341.5 2897,2440.5 2858.5,2440.5
  pour cut-out: 2930,972 2930,801.5 3045.5,801.5 3045.5,972 2930,972
  pour cut-out: 2220.5,26 2220.5,312 1109.5,312 1109.5,26 2220.5,26
  pour cut-out: 2930,2688 2930,2495.5 3040,2495.5 3040,2688 2930,2688
  pour cut-out: 1417.5,26 1417.5,130.5 1120.5,130.5 1120.5,26 1417.5,26
  pour cut-out: 1494.5,3034.5 1252.5,3034.5 1252.5,2930 1494.5,2930 1494.5,3034.5
  pour cut-out: 196.5,2055.5 196.5,1923.5 235,1923.5 235,2055.5 196.5,2055.5
  pour cut-out: 2946.5,983 3023.5,983 3023.5,988.5 2946.5,988.5 2946.5,983
  pour cut-out: 1791.5,2644 1791.5,2605.5 1813.5,2605.5 1813.5,2644 1791.5,2644
  pour cut-out: 3914.5,988.5 3667,988.5 3667,708 3914.5,708 3914.5,988.5
  pour cut-out: 3738.5,3045.5 3683.5,3045.5 3683.5,2880.5 3738.5,2880.5 3738.5,3045.5
PWR_03:
  pour cut-out: 1643,2649.5 1643,2627.5 1720,2627.5 1720,2649.5 1643,2649.5
  pour cut-out: 2561.5,2660.5 2561.5,2600 2578,2600 2578,2660.5 2561.5,2660.5
  pour cut-out: 2726.5,1263.5 2787,1263.5 2787,1274.5 2726.5,1274.5 2726.5,1263.5
  pour cut-out: 2798,2270 2798,2132.5 2825.5,2132.5 2825.5,2270 2798,2270
  pour cut-out: 350.5,994 350.5,796 554,796 554,994 350.5,994
  pour cut-out: 2660.5,1230.5 2710,1230.5 2710,1252.5 2660.5,1252.5 2660.5,1230.5

## Silkscreen, mask and mechanical layers (free items; w line width, h text height)
Silkscreen Top:
  text "+5" at 2524.5,2816 h90
  text "ZF" at 1980,2722.5 h90
  text "M" at 2079,2722.5 h90
  text "PWM" at 2167,2722.5 h90
  text "G" at 2365,2722.5 h90
  text "ZF" at 594,2376 h90
  text "M" at 693,2376 h90
  text "PWM" at 770,2376 h90
  text "G" at 962.5,2376 h90
  text "+5" at 1094.5,2288 h90
  text "PWM" at 1677.5,1974.5 h90 r270
  text "+5" at 1815,1936 h90 r270
  text "ZF" at 1551,1919.5 h90 r270
  text "M" at 1617,1914 h90 r270
  text "G" at 1749,1908.5 h90 r270
  text "+5" at 555.5,473 h90
  text "GND" at 522.5,396 h90
  text "PWM" at 528,330 h90
  text "M" at 572,264 h90
  text "ZF" at 566.5,192.5 h90
  text "細米露" at 3333,165 h180